# Altium PCB TL200蓝牙主板.PcbDoc
Units mm, origin at the board's own origin, x right, y up, seen from the top; angles counter-clockwise.
Board outline 65 x 53.06 mm, 2 copper layers (Top Layer, Bottom Layer); 107 components, 85 nets, 326 pads, 179 vias.
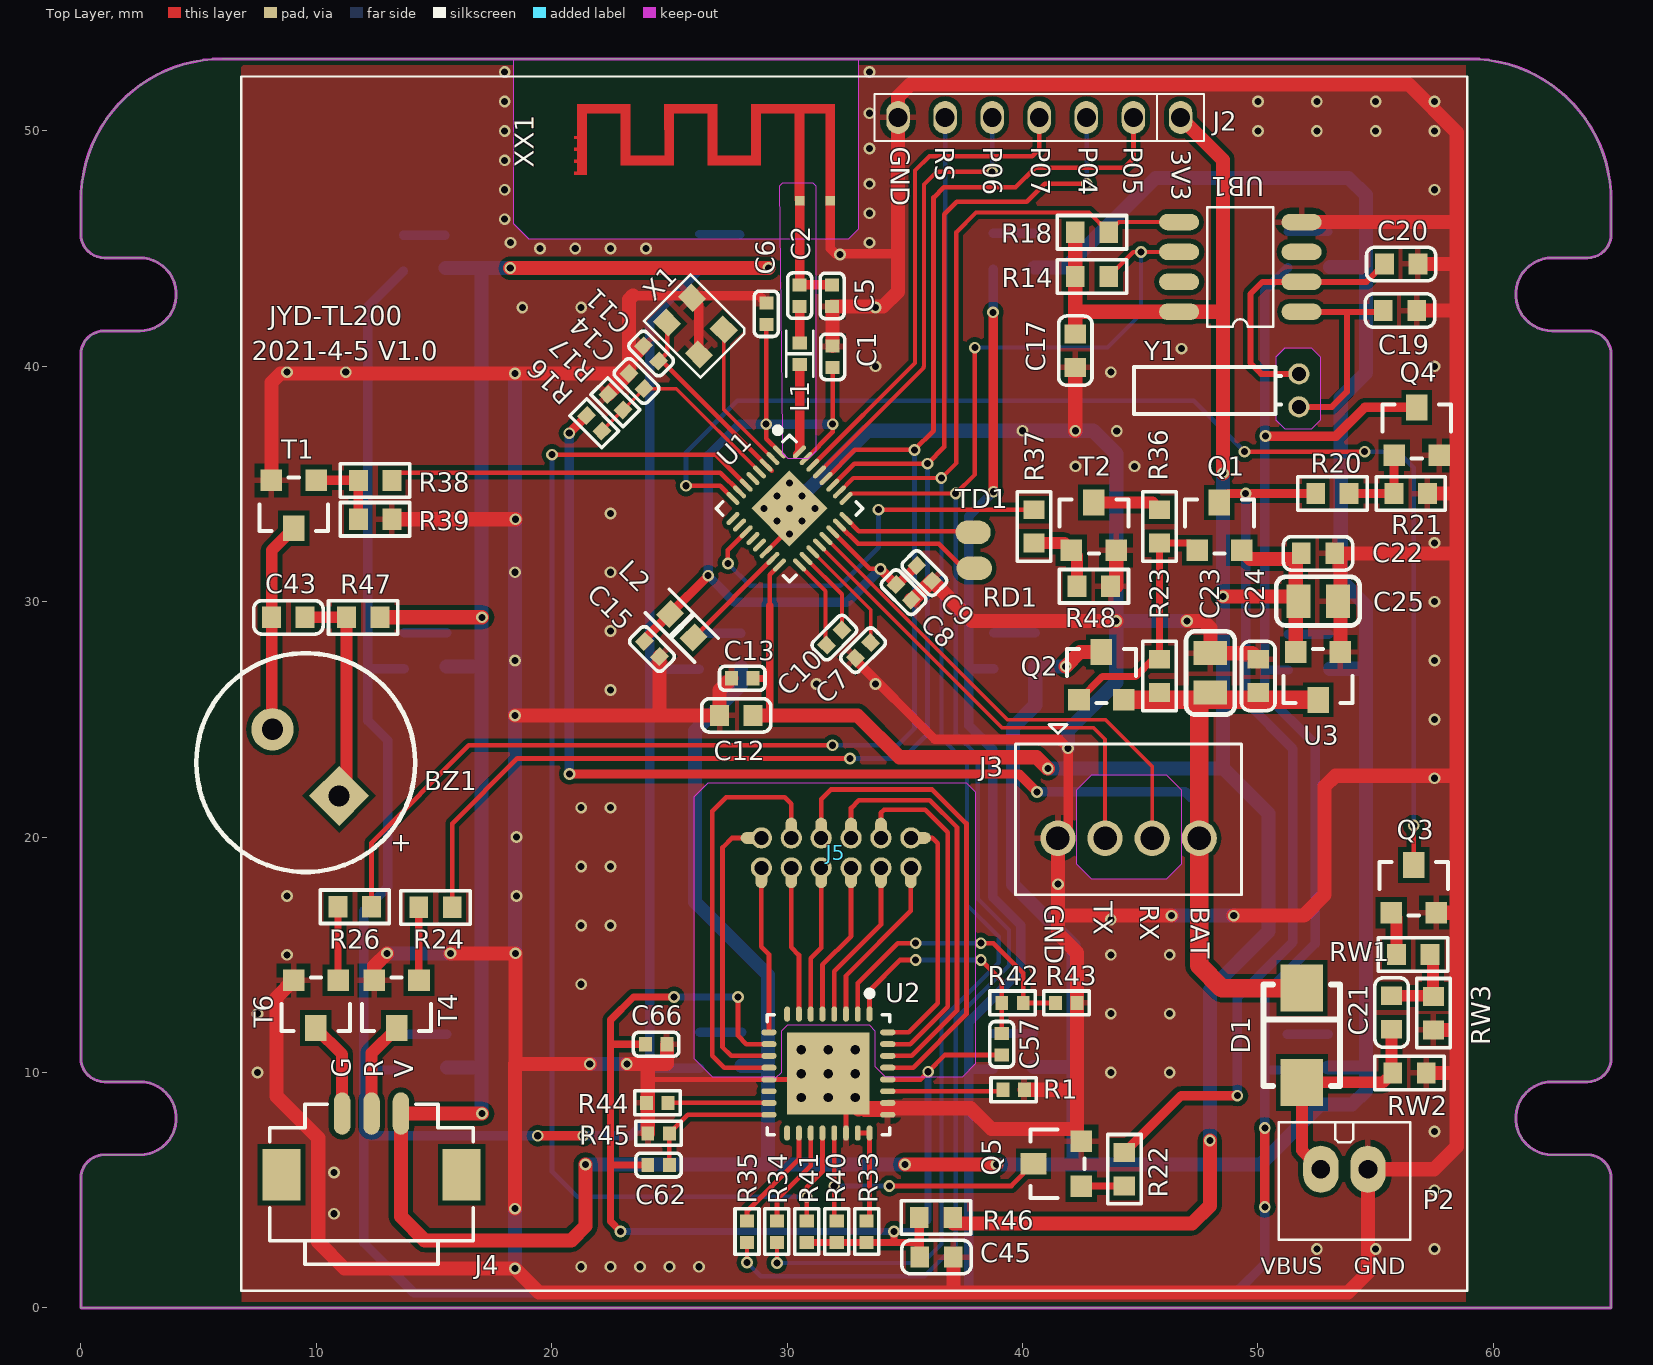
[diagram p0: Top Layer view]
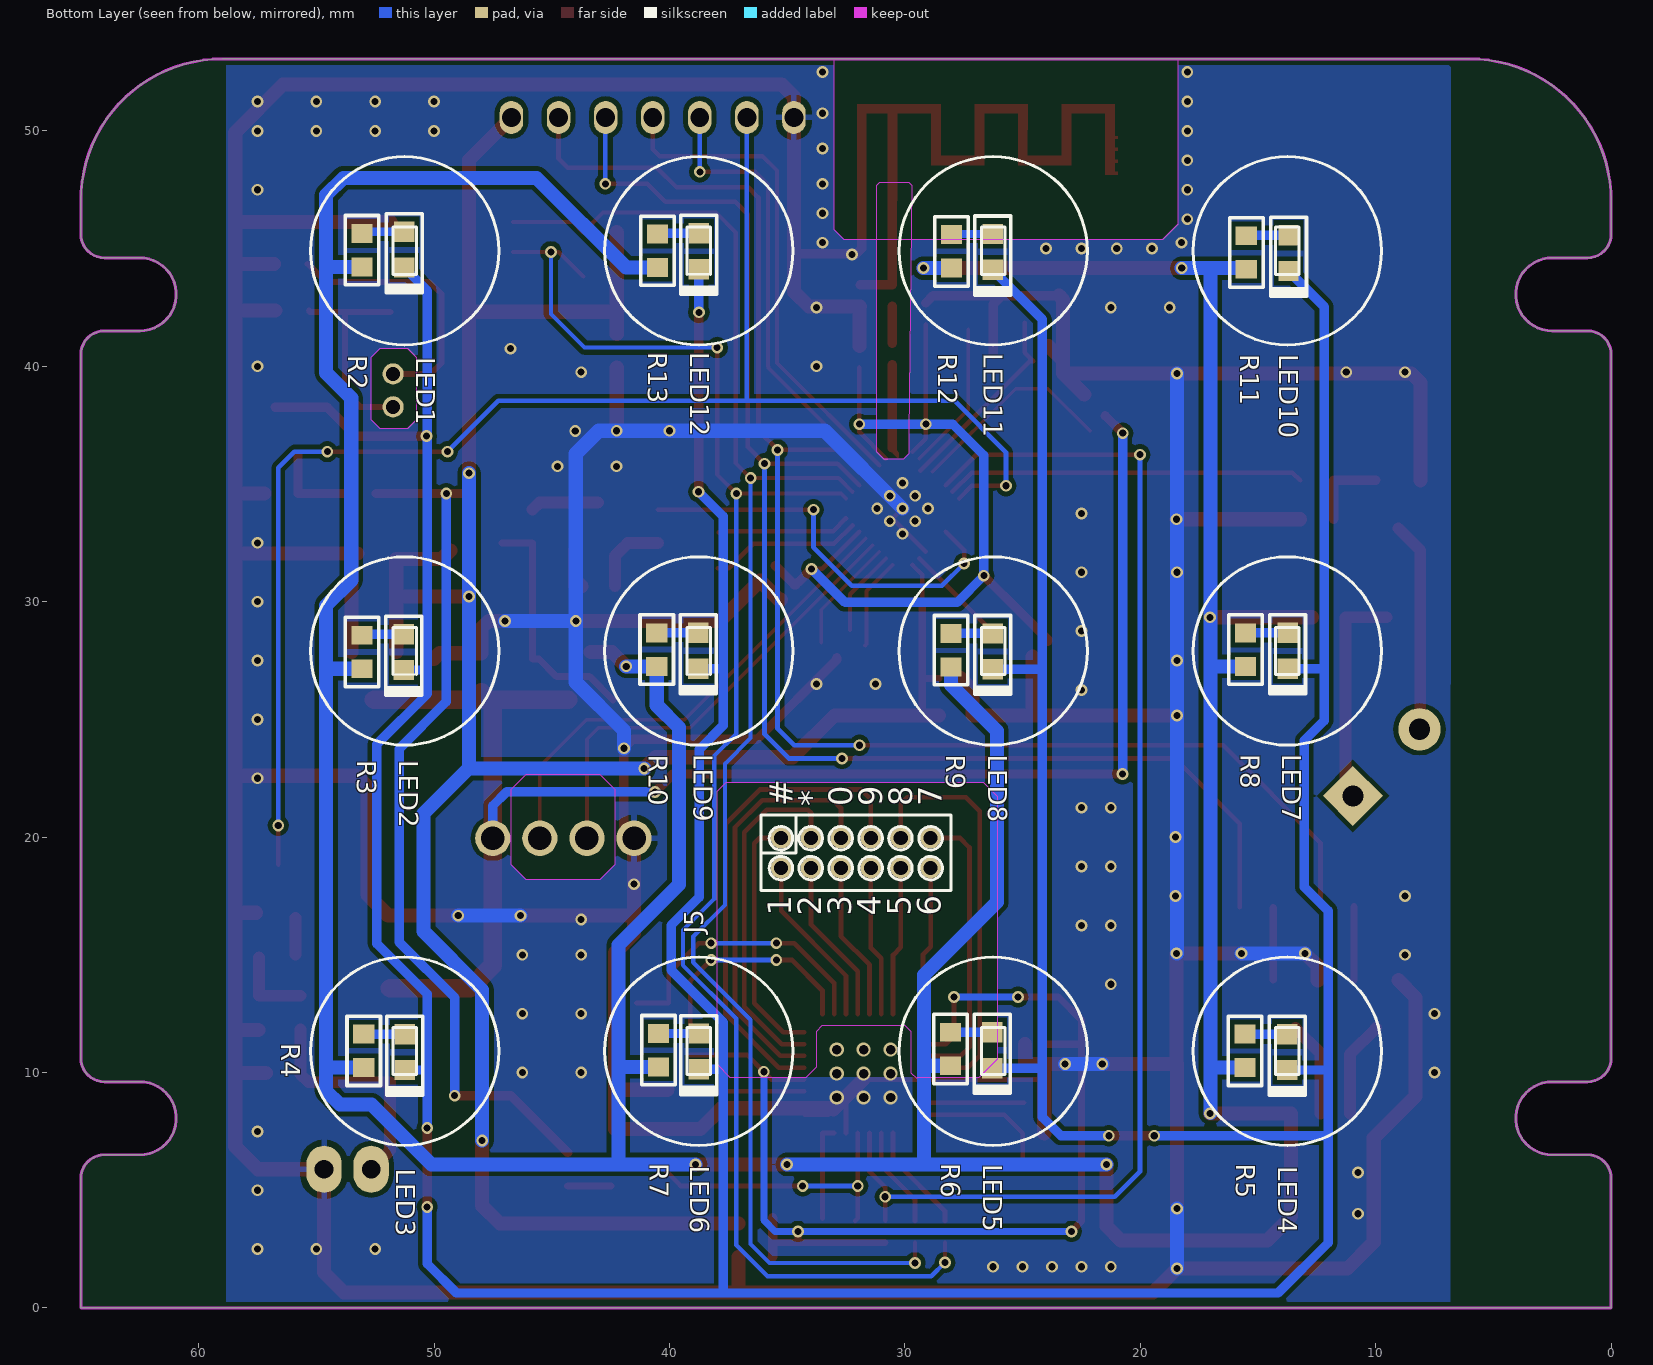
[diagram p1: Bottom Layer view, seen from below]
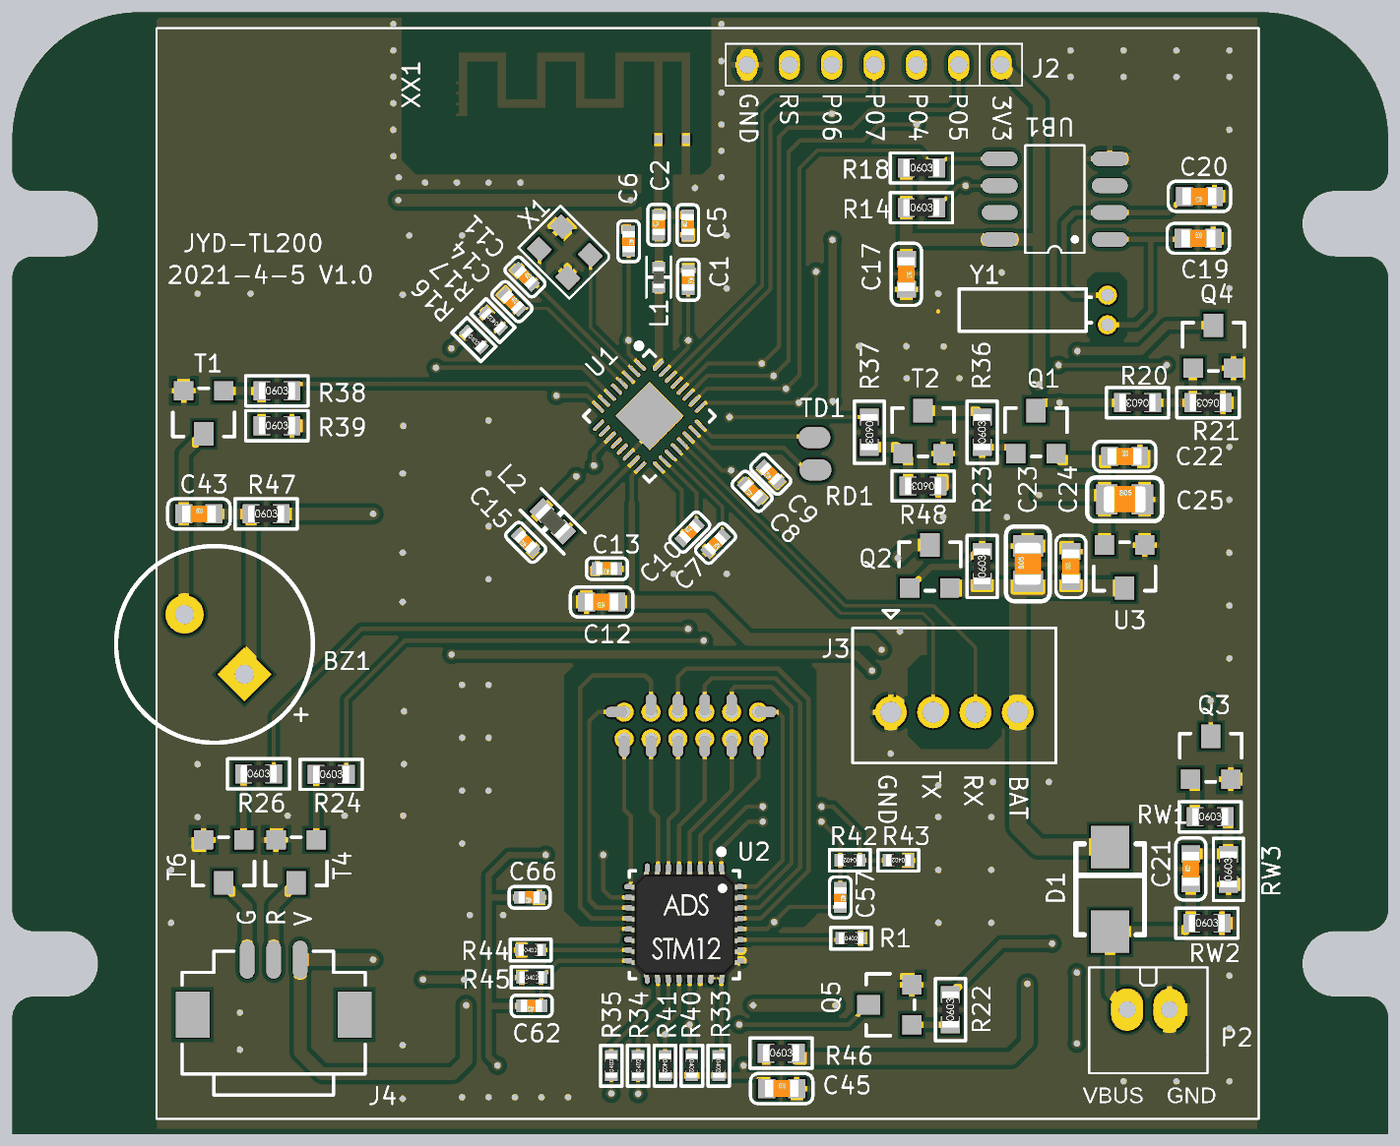
[diagram p2: 3D render of the assembled board from above, using the file's embedded part models]
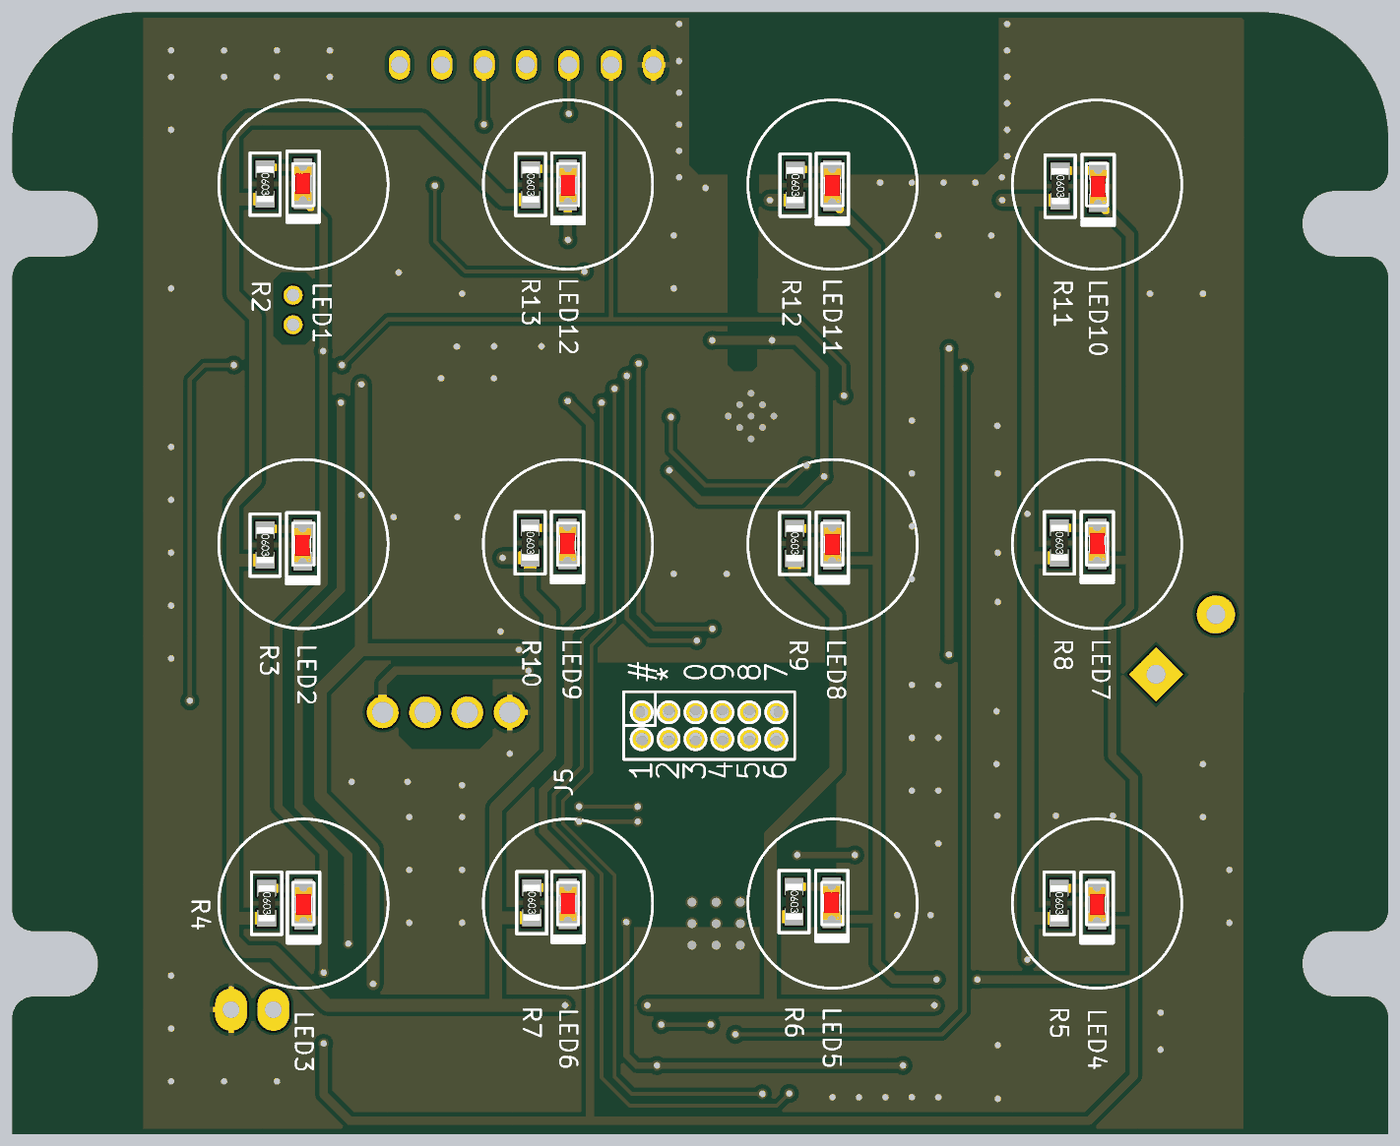
[diagram p3: 3D render of the assembled board from below, using the file's embedded part models]

## Layer stack, top to bottom
Top Layer: signal copper 0.0356
Dielectric: dielectric 0.32, FR-4, Dk 4.8
Bottom Layer: signal copper 0.0356

## Board outline
0,0 0,5.507 cw(c1,5.507) 1,6.507 2.5,6.507 ccw(c2.5,8.057) 2.5,9.607 1,9.607 cw(c1,10.607) 0,10.607 0,40.507 cw(c1,40.507) 1,41.507 2.5,41.507 ccw(c2.5,43.057) 2.5,44.607 1,44.607 cw(c1,45.607) 0,45.607 0,47.057 cw(c6,47.057) 6,53.057 59,53.057 cw(c59,47.057) 65,47.057 65,45.607 cw(c64,45.607) 64,44.607 62.5,44.607 ccw(c62.5,43.057) 62.5,41.507 64,41.507 cw(c64,40.507) 65,40.507 65,10.607 cw(c64,10.607) 64,9.607 62.5,9.607 ccw(c62.5,8.057) 62.5,6.507 64,6.507 cw(c64,5.507) 65,5.507 65,0

## Design rules (kind name [scope] priority, off if disabled: settings)
Clearance Clearance_1 [(IsWire)or(IsThruPin)or(IsFill)or(InPolygon)or(IsKeepOut) vs (IsWire)or(IsThruPin)or(IsFill)or(InPolygon)or(IsKeepOut)] p1 off: gap=0.279
Clearance [All] p2: gap=0.2
ComponentClearance [All] p1: gap=0 collisioncheckmode=3 verticalgap=0 showdistances=FALSE
HoleSize [All] p1: absolutevalues=TRUE maxlimit=10 minlimit=0.025 maxpercent=80.000 minpercent=20.000
HoleToHoleClearance [All] p1: gap=0 allowstackedmicrovias=TRUE
MinimumSolderMaskSliver [All] p1: minsoldermaskwidth=0
PolygonConnect PolygonConnect_1 [IsVia] p1: connectstyle=Direct reliefconductorwidth=0.254 reliefentries=4 polygonreliefangle="90 Angle" airgapwidth=0.254
PolygonConnect [All] p2: connectstyle=Relief reliefconductorwidth=0.254 reliefentries=4 polygonreliefangle="90 Angle" airgapwidth=0.254
RoutingVias [All] p1: holewidth=0.711 width=1.27 viastyle="Through Hole" minholewidth=0.152 minwidth=0.203 maxholewidth=0.711 maxwidth=0.711
ShortCircuit [All] p1: allowed=TRUE
SilkToSilkClearance [All] p1: silktosilkclearance=0
SilkToSolderMaskClearance SilkscreenOverComponentPads [IsPad] p1: minsilkscreentomaskgap=0 clearancetoexposedcopper=TRUE
SolderMaskExpansion [All] p1: expansion=0.102
Width [All] p1: maxlimit=2.032 minlimit=0.076 preferedwidth=0.254
21 further rules are at their usual default settings.

## Components (designator, comment, footprint, x,y, rotation, side; value= is the part's Value field where it differs from the comment)
BZ1 "BUZZER" BUZZER_D93_L40 9.55,23.165 r135 top
C1 "1uF/6.3V" LC-0402_C 31.934,40.402 r270 top
C2 "1.0pF" LC-0402_C 30.531,43.002 r90 top
C5 "NC" LC-0402_C 31.909,42.993 r90 top
C6 "0.1uF" LC-0402_C 29.115,42.231 r270 top
C7 "0.1uF" LC-0402_C 33.223,27.94 r225 top
C8 "1uF" LC-0402_C 34.949,30.404 r135 top
C9 "0.1uF" LC-0402_C 35.829,31.212 r135 top
C10 "0.1uF" LC-0402_C 32.004,28.475 r45 top
C11 "2.7pF" LC-0402_C 24.22,40.543 r315 top
C12 "10uF/6.3V" LC-0603_C 27.838,25.171 r180 top
C13 "0.1uF" LC-0402_C 28.092,26.746 r180 top
C14 "1nF" LC-0402_C 23.603,39.374 r315 top
C15 "10uF" LC-0402_C 24.257,27.991 r135 top
C17 "1uF/6.3V" LC-0603_C 42.24,40.665 r270 top
C19 "22pF" LC-0603_C 56.032,42.367 r0 top
C20 "22pF" LC-0603_C 56.083,44.348 r180 top
C21 "10uF/10V" LC-0603_C 55.677,12.548 r90 top
C22 "100nF" LC-0603_C 52.553,32.055 r0 top
C23 "22uF/10V" LC-0805_C 47.981,26.975 r90 top
C24 "100nF" LC-0603_C 50.013,26.848 r90 top
C25 "10uF/10V" LC-0805_C 52.553,30.023 r0 top
C43 "10uF/10V" LC-0603_C 8.814,29.337 r0 top
C45 "1uF" LC-0603_C 36.347,2.159 r0 top
C57 "820P 1%" LC-0402_C 39.116,11.201 r270 top
C62 "0.1uF" LC-0402_C 24.536,6.071 r180 top
C66 "0.1uF" LC-0402_C 24.435,11.201 r180 top
D1 "SS14" DO-214AA 51.867,11.582 r270 top
J2 "7P" 7P-2.0MM 46.711,50.571 r180 top
J3 "后板串口" 4P-2.0XX 41.504,19.952 r0 top
J4 "S3B-PH-KL" 3P-1.25mm-SMT 12.344,8.255 r0 top
J5 "Header 12H" 6P*2*1.27MM_1 32.08,19.329 r180 bottom
L1 "2nH" LC-0402_L 30.537,40.529 r270 top
L2 "4.7uH" LC-0603_L 25.527,28.981 r315 top
LED1 "LED" 0603LED 51.269,44.956 r270 bottom
LED2 "LED" 0603LED 51.283,27.861 r270 bottom
LED3 "LED" 0603LED 51.246,10.869 r270 bottom
LED4 "LED" 0603LED 13.753,10.87 r270 bottom
LED5 "LED" 0603LED 26.289,10.947 r270 bottom
LED6 "LED" 0603LED 38.749,10.896 r270 bottom
LED7 "LED" 0603LED 13.741,27.915 r270 bottom
LED8 "LED" 0603LED 26.264,27.89 r270 bottom
LED9 "LED" 0603LED 38.774,27.915 r270 bottom
LED10 "LED" 0603LED 13.702,44.808 r270 bottom
LED11 "LED" 0603LED 26.264,44.859 r270 bottom
LED12 "LED" 0603LED 38.749,44.884 r270 bottom
P2 "应急接口" 2PIN-2.0 53.67,5.893 r180 top
Q1 "SI2301" "SOT-23 - GDS" 48.362,33.198 r0 top
Q2 "SI2301" "SOT-23 - GDS" 43.348,26.848 r0 top
Q3 "PMBT3904" SOT-23-3L 56.617,17.805 r0 top
Q4 "SS8050" SOT-23-3L 56.744,37.236 r0 top
Q5 "PMBT3904" SOT-23-3L 41.478,6.121 r90 top
R1 "2M1%" LC-0402_R 39.624,9.271 r0 top
R2 "100R" LC-0603_R 53.061,44.933 r270 bottom
R3 "100R" LC-0603_R 53.061,27.861 r270 bottom
R4 "100R" LC-0603_R 52.984,10.922 r270 bottom
R5 "100R" LC-0603_R 15.545,10.922 r270 bottom
R6 "100R" LC-0603_R 28.067,10.998 r270 bottom
R7 "100R" LC-0603_R 40.462,10.947 r270 bottom
R8 "100R" LC-0603_R 15.533,27.965 r270 bottom
R9 "100R" LC-0603_R 28.042,27.94 r270 bottom
R10 "100R" LC-0603_R 40.538,27.965 r270 bottom
R11 "100R" LC-0603_R 15.494,44.831 r270 bottom
R12 "100R" LC-0603_R 28.016,44.882 r270 bottom
R13 "100R" LC-0603_R 40.513,44.907 r270 bottom
R14 "10K" LC-0603_R 42.951,43.815 r0 top
R16 "510K%1" LC-0402_R 21.807,37.578 r315 top
R17 "100K%1" LC-0402_R 22.705,38.476 r135 top
R18 "10K" LC-0603_R 42.951,45.695 r0 top
R20 "1K" LC-0603_R 53.162,34.595 r180 top
R21 "10K" LC-0603_R 56.49,34.595 r180 top
R22 "10K" LC-0603_R 44.323,5.893 r90 top
R23 "100K" LC-0603_R 45.822,26.848 r90 top
R24 "10K" LC-0603_R 15.062,17.018 r0 top
R26 "10K" LC-0603_R 11.633,17.043 r0 top
R33 "10K" LC-0402_R 33.375,3.241 r270 top
R34 "10R" LC-0402_R 29.565,3.241 r90 top
R35 "10R" LC-0402_R 28.295,3.241 r90 top
R36 "1K" LC-0603_R 45.822,33.198 r90 top
R37 "4.7K" LC-0603_R 40.488,33.198 r270 top
R38 "1K" LC-0603_R 12.497,35.154 r0 top
R39 "10K" LC-0603_R 12.497,33.503 r0 top
R40 "10K" LC-0402_R 32.105,3.241 r270 top
R41 "10K" LC-0402_R 30.835,3.241 r270 top
R42 "510K1%" LC-0402_R 39.573,12.954 r180 top
R43 "2M1%" LC-0402_R 41.859,12.954 r180 top
R44 "36K 1%" LC-0402_R 24.486,8.712 r0 top
R45 "330K" LC-0402_R 24.536,7.417 r0 top
R46 "0R-空" LC-0603_R 36.322,3.835 r0 top
R47 "10R" LC-0603_R 11.989,29.337 r0 top
R48 "100K" LC-0603_R 43.028,30.658 r180 top
RD1 "DC+" "TP-THD - 1mm" 37.948,31.42 r0 top
RW1 "22R" LC-0603_R 56.591,15.011 r0 top
RW2 "100K" LC-0603_R 56.439,9.982 r0 top
RW3 "100K" LC-0603_R 57.455,12.522 r90 top
T1 "SS8050" SOT-23-3L 9.042,34.138 r180 top
T2 "PMBT3904" SOT-23-3L 43.028,33.198 r0 top
T4 "PMBT3904" SOT-23-3L 13.411,12.903 r180 top
T6 "PMBT3904" SOT-23-3L 9.982,12.903 r180 top
TD1 "DC+" "TP-THD - 1mm" 37.897,32.944 r0 top
U1 "BK3431Q" QFN32_4*4*0.4 30.099,33.96 r315 top
U2 "TSM12M" ADS_TMS12 31.75,9.957 r270 top
U3 "HT7533" SOT-23-3L 52.553,26.848 r180 top
UB1 "PCF8563" SOP8 49.251,44.221 r180 top
X1 "16MHZ" XTAL3225 26.106,41.71 r135 top
XX1 "TIANX" BT_NAMI_1 30.531,47.041 r0 top
Y1 "32.768KHZ" 晶振-9 51.74,38.278 r90 top

## Footprints (in the part's own frame and the unit in brackets; to place one, negate y for a bottom-side part, rotate by r counter-clockwise, add the part's x,y. Pads: shape width x height; smd on the part's side, far side on the other; paste and mask are expansions set on the pad)
2PIN-2.0 [mm]
  oval 1.5x2 hole 0.8: 1(-1,0) 2(1,0)
  silkscreen extent -2.8,-2 2.79,3
3P-1.25mm-SMT [mm]
  oval 0.7x1.8 smd mask+0.05: 1(-1.25,0) 2(0,0) 3(1.25,0)
  rect 1.6x2.2 smd mask+0.05: 4(-3.825,-2.6) 5(3.825,-2.6)
  silkscreen extent -4.33,-6.4 4.33,0.4
4P-2.0XX [mm]
  round 1.5 hole 1: 1(0,0) 2(2,0) 3(4,0) 4(6,0)
  silkscreen extent -1.8,-2.4 7.8,4.83
6P*2*1.27MM_1 [mm]
  oval 1x0.5 smd far side: 1(-3.527,0.635) 11(3.556,0.635)
  round 0.9 hole 0.6 paste+1: 1(-3.175,0.635)
  oval 0.5x1 smd far side: 2(-3.175,-1) 3(-1.905,1) 4(-1.905,-1) 5(-0.635,1) 6(-0.635,-1) 7(0.635,1) 8(0.635,-1) 9(1.905,1) 10(1.905,-1) 12(3.175,-1)
  round 0.9 hole 0.6 paste+0: 2(-3.175,-0.635) 3(-1.905,0.635) 4(-1.905,-0.635) 5(-0.635,0.635) 6(-0.635,-0.635) 7(0.635,0.635) 8(0.635,-0.635) 9(1.905,0.635) 10(1.905,-0.635) 11(3.175,0.635) 12(3.175,-0.635)
  silkscreen extent -4.04,-1.6 4.04,1.6
7P-2.0MM [mm]
  oval 1x1.4 hole 0.8 mask+0.05: 1(0,0) 2(2,0) 3(4,0) 4(6,0) 5(8,0) 6(10,0) 7(12,0)
  silkscreen extent -1,-1 13,1
0603LED [mil]
  rect 34x34 smd: 1(-30,0) 2(30,0)
  silkscreen extent -60,-30 72,30, body extent -31,-16 31,16, height 24
ADS_TMS12 [mm]
  oval 0.65x0.25 smd: 1(-2.525,1.75) 2(-2.525,1.25) 3(-2.525,0.75) 4(-2.525,0.25) 5(-2.525,-0.25) 6(-2.525,-0.75) 7(-2.525,-1.25) 8(-2.525,-1.75) 17(2.525,-1.75) 18(2.525,-1.25) 19(2.525,-0.75) 20(2.525,-0.25) 21(2.525,0.25) 22(2.525,0.75) 23(2.525,1.25) 24(2.525,1.75)
  oval 0.25x0.65 smd: 9(-1.75,-2.525) 10(-1.25,-2.525) 11(-0.75,-2.525) 12(-0.25,-2.525) 13(0.25,-2.525) 14(0.75,-2.525) 15(1.25,-2.525) 16(1.75,-2.525) 25(1.75,2.525) 26(1.25,2.525) 27(0.75,2.525) 28(0.25,2.525) 29(-0.25,2.525) 30(-0.75,2.525) 31(-1.25,2.525) 32(-1.75,2.525)
  rect 3.5x3.5 smd: 33(0,0)
  silkscreen extent -3.52,-2.6 2.6,2.6, body extent -2.46,-2.49 2.54,2.51, height 0.9
BT_NAMI_1 [mm]
  rect 0.4x0.4 smd: 1(0,0) 2(1.3,0)
  Top Layer region: -7.2,4.1 -9.45,4.1 -9.45,2.74 -9.58,2.74 -9.58,2.63 -9.45,2.63 -9.45,2.24 -9.58,2.24 -9.58,2.12 -9.45,2.12 -9.45,1.73 -9.58,1.73 -9.58,1.61 -9.45,1.61 -9.45,1.22 -9.58,1.22 -9.58,1.1 -9.05,1.1 -9.05,3.7 -7.6,3.7 -7.6,1.5 -5.35,1.5 -5.35,3.7 -3.9,3.7 -3.9,1.5 -1.65,1.5 -1.65,3.7 -0.2,3.7 -0.2,0 0.2,0 0.2,3.7 1.1,3.7 1.1,0 1.5,0 1.5,4.1 -2.05,4.1 -2.05,1.91 -3.5,1.91 -3.5,4.1 -5.75,4.1 -5.74,1.9 -7.2,1.9
BUZZER_D93_L40 [mm]
  rect 1.8x1.8 hole 0.9: 1(-2,0)
  round 1.8 hole 0.9: 2(2,0)
  silkscreen extent -4.65,-4.65 4.65,4.65
DO-214AA [mm]
  rect 2x1.8 smd: 1(2,0) 2(-2,0)
  silkscreen extent -2.15,-1.63 2.15,1.63
LC-0402_C [mm]
  rect 0.55x0.6 smd mask+0.051: 1(-0.457,0) 2(0.457,0)
  silkscreen extent -0.97,-0.51 0.97,0.51, body extent -0.48,-0.3 0.52,0.3, height 0.2
LC-0402_L [mm]
  rect 0.55x0.6 smd mask+0.051: 1(-0.457,0) 2(0.457,0)
  silkscreen extent -0.98,-0.58 0.97,0.58, body extent -0.51,-0.26 0.54,0.26, height 0.36
LC-0402_R [mm]
  rect 0.55x0.6 smd mask+0.051: 1(-0.457,0) 2(0.457,0)
  silkscreen extent -0.97,-0.51 0.97,0.51, body extent -0.57,-0.27 0.58,0.28, height 0.41
LC-0603_C [mm]
  rect 0.8x0.9 smd: 1(-0.711,0) 2(0.711,0)
  silkscreen extent -1.47,-0.71 1.47,0.71, body extent -0.8,-0.4 0.8,0.4, height 0.3
LC-0603_L [mm]
  rect 0.8x0.9 smd: 1(-0.711,0) 2(0.711,0)
  silkscreen extent -1.47,-0.71 1.47,0.71, body extent -0.82,-0.41 0.83,0.41, height 0.46
LC-0603_R [mm]
  rect 0.8x0.9 smd: 1(-0.711,0) 2(0.711,0)
  silkscreen extent -1.47,-0.71 1.47,0.71, body extent -0.85,-0.4 0.85,0.4, height 0.56
LC-0805_C [mil]
  rect 40x56 smd: 1(-33,0) 2(33,0)
  silkscreen extent -70,-41 70,41, body extent -39,-25 39,25, height 30
QFN32_4*4*0.4 [mm]
  rect 2.3x2.3 smd paste-0.025 mask+0.051: 0(0,0)
  oval 0.7x0.2 smd paste-0.025 mask+0.051: 1(-2,1.4) 2(-2,1) 3(-2,0.6) 4(-2,0.2) 5(-2,-0.2) 6(-2,-0.6) 7(-2,-1) 8(-2,-1.4) 17(2,-1.4) 18(2,-1) 19(2,-0.6) 20(2,-0.2) 21(2,0.2) 22(2,0.6) 23(2,1) 24(2,1.4)
  oval 0.2x0.7 smd paste-0.025 mask+0.051: 9(-1.4,-2) 10(-1,-2) 11(-0.6,-2) 12(-0.2,-2) 13(0.2,-2) 14(0.6,-2) 15(1,-2) 16(1.4,-2) 25(1.4,2) 26(1,2) 27(0.6,2) 28(0.2,2) 29(-0.2,2) 30(-0.6,2) 31(-1,2) 32(-1.4,2)
  silkscreen extent -2.82,-2.2 2.2,2.2
SOP8 [mm]
  oval 1.7x0.7 smd mask+0.05: 1(-2.6,1.905) 2(-2.6,0.635) 3(-2.6,-0.635) 4(-2.6,-1.905) 5(2.6,-1.905) 6(2.6,-0.635) 7(2.6,0.635) 8(2.6,1.905)
  round 0.4 on Top Overlay mask+0.05: ""(-0.949,1.905)
  silkscreen extent -1.4,-2.54 1.4,2.54
"SOT-23 - GDS" [mil]
  rect 36x43.31 smd: D(0,40)
  rect 36x36 smd: G(-37.4,-40) S(37.4,-40)
  silkscreen extent -57,-45 58,45
SOT-23-3L [mil]
  rect 36x36 smd: 1(-37.4,-40) 2(37.4,-40)
  rect 36x43.31 smd: 3(0,40)
  silkscreen extent -57,-45 58,45
"TP-THD - 1mm" [mm]
  oval 1.5x1 smd: 1(0,0)
XTAL3225 [mm]
  rect 0.9x0.8 smd: 1(-0.95,-0.75) 2(0.95,-0.75) 3(0.95,0.75) 4(-0.95,0.75)
  silkscreen extent -1.7,-1.4 1.7,1.4
晶振-9 [mm]
  round 0.9 hole 0.6: 1(0,0) 2(1.4,0)
  rect 0x0 smd: 3(0.635,8)
  silkscreen extent -0.3,0.76 1.7,7

## Part data
BZ1: "Buzzer"
C1 C2 C5 C6 C7 C8 C9 C10 C11 C12 C13 C15: library part Cap, "Capacitor"
C14 C21 C22 C24: library part CAP-NP, "Capacitor, Ceramic"
C17 C19 C20: library part C
C23 C25: library part CAP-P, "Capacitor, tolerance ±20%"
C43: library part C_0_Dup1
C45: library part C-C?, "Electrolytic Capacitor"
C57 C62 C66: library part CAP, "Capacitor"
D1: library part D
J3: library part "Header 4H", "Header, 4-Pin, Right Angle"
J4: library part "Header 3", "Header, 3-Pin"
J5: "Header, 12-Pin, Right Angle"
L1 L2: "Power Inductor, 4.7uH, 0.7A, 260mR DCR"
P2: library part "Header 2", "Header, 2-Pin"
Q1 Q2: library part PWRMOSFET_EP_DGS_0
Q4 Q5 T1 T2 T4 T6: library part NPN_BJT, "Bipolar Junction Transistor"
R1 R22 R33 R40 R41 R42 R43 R44 R45: library part RES2
R2 R3 R4 R5 R6 R7 R8 R9 R10 R11 R12 R13 R20 R21 R23 R36 R37 R47 R48 RW1 RW2 RW3: library part R
R14 R18: library part RES_0603A, "Resistor"
R16 R17: library part Res2, "Resistor"
R24 R26: library part RES
R34 R35 R38 R39: library part R_Dup1
R46: library part POWER-R
RD1 TD1: library part con1
U3: library part XC6206P302M
UB1: library part IC8
Y1: library part 晶振

## Via types
v1: diameter 0.5, hole 0.3, Top Layer to Bottom Layer, tented both sides, 170 vias
v2: diameter 0.6, hole 0.4, Top Layer to Bottom Layer, tented both sides, 9 vias

## Nets (pads, with @x,y where several pads share a name; then routed paths per layer and width w, separated by ;. In a path a pad name is that pad's centre, name@x,y a point inside that pad or via, vN(x,y) a via of type N, cw(c..) or ccw(c..) an arc to the next point about the centre after c; other vN are vias at no path point)
BAT_ADC: C14.2 R16.2 R17.1 U1.4 | length 8.9
  Top Layer w0.152: R16.2 C14.2 25.291,39.05 U1.4
BEEP: R38.2 U1.7 | length 15.2
  Top Layer w0.2: R38.2 13.538,35.484 27.161,35.484 U1.7
GND: C1.1 C5.1 C6.1 C7.2 C8.1 C9.1 C11.1 C12.2 C13.2 C14.1 C15.1 C17.2 C19.2 C20.1 C22.2 C23.2 C24.2 C25.2 C45.2 C66.1 J2.7 J3.1 P2.1 Q3.2 Q4.2 Q5.2 R1.2 R17.2 R21.1 R39.2 R43.1 R44.1 R45.1 R48.1 RW2.2 RW3.1 T1.2 T2.2 T4.2 T6.2 U1.0 U1.14 U2.13 U2.22 U2.25 U2.26 U2.33 U3.1 UB1.4 X1.2 X1.4 XX1.2 | length 411.4
  Top Layer w0.2: 24.054,9.707 U2.13 31.5,9.707 v2(31.75,9.957) ; U1.14 30.409,33.421 v1(30.638,33.421) v1(30.099,33.96) ; U2.22 U2.33@32.5,8.941 ; U2.33@33.033,8.433 33.259,8.207 U2.25
  Top Layer w0.4: 23.444,43.002 28.801,43.002 C6.1 ; X1.2 26.248,42.63 X1.4 ; XX1.2 31.831,45.004 32.055,44.78 34.711,44.78 ; C7.2 32.9,27.527 36.271,24.155 41.554,24.155 v1(41.935,23.774) 41.935,20.383 J3.1
  Top Layer w0.6: T1.2 8.092,39.309 8.48,39.697 v1(18.44,39.697) C14.1 ; T6.2 8.306,13.193 8.306,8.992 10.084,7.214 10.084,2.794 11.201,1.676 v1(18.44,1.676) 19.456,0.66 37.059,0.66 ; T4.2 12.461,14.519 v1(13.005,15.062) ; R39.2 v1(18.466,33.503) ; v1(15.697,15.062) v1(18.466,15.062) 18.466,10.389 18.44,10.363 ; v1(18.44,4.216) 18.44,10.363 ; v1(18.44,25.171) 24.638,25.171 ; v1(21.615,10.363) 18.44,10.363 ; R17.2 C14.1 ; v1(23.19,10.363) 24.867,10.363 24.892,10.389 C66.1 ; 23.368,40.337 C11.1 ; 23.444,43.002 23.28,42.838 C14.1 ; R45.1 24.079,10.312 ; C15.1 24.58,25.229 24.638,25.171 ; C13.2 27.127,26.238 C12.2 24.638,25.171 ; U2.33@31.75,9.716 32.983,8.484 U2.33@33.033,8.484 ; C1.1 31.934,42.51 C5.1 34.077,42.536 34.711,43.169 J2.7 34.711,51.449 35.23,51.968 56.413,51.968 58.445,49.936 58.445,42.393 ; U2.33@33.033,8.433 U2.33@33.033,8.484 ; C8.1 35.344,30.081 C9.1 37.856,29.185 v1(43.978,29.185) ; C45.2 37.059,0.66 ; R1.2 42.316,9.271 ; J3.1 41.504,16.662 ; v1(42.24,37.262) C17.2 ; R48.1 R48.1@43.978,30.897 ; R48.1@43.978,30.658 R48.1@43.978,30.897 ; T2.2 R48.1@43.978,30.897 ; v1(46.33,16.662) 41.504,16.662 ; v1(46.99,29.185) 47.676,29.185 47.981,28.88 C23.2 49.759,27.813 C24.2 ; v1(48.971,16.662) 51.943,16.662 52.832,17.551 52.832,22.149 53.289,22.606 58.445,22.606 ; UB1.4 58.445,46.126 ; C22.2 58.42,32.055 58.445,32.029 ; U3.1 C22.2@53.503,32.014 ; C19.2 58.42,42.367 58.445,42.393 ; C20.1 58.42,44.348 ; RW2.2 58.42,9.982 58.445,9.957 ; R21.1 58.445,34.595 ; RW3.1 58.42,11.811 58.445,11.786 ; Q3.2 58.42,16.789 ; U2.33@33.033,8.484 37.795,8.484 38.684,7.595 42.316,7.595 42.316,9.271 ; 37.059,0.66 53.823,0.66 54.67,1.508 P2.1 57.48,5.893 58.445,6.858 58.445,9.957 ; 41.504,16.662 41.504,15.9 42.316,15.088 R43.1 42.316,9.271 ; 58.445,9.957 58.445,11.786 ; 58.445,11.786 58.445,22.606 ; 58.445,22.606 58.445,32.029 ; 58.445,32.029 58.445,34.595 ; 58.445,34.595 58.445,42.393
  Bottom Layer w0.6: v1(13.005,15.062) v1(15.697,15.062) ; v1(18.44,1.676) v1(18.44,4.216) ; v1@18.44,15.062 v1(18.44,25.171) v1(18.44,39.697) ; v1(21.615,10.363) v1(23.19,10.363) ; v1(30.099,33.96) 33.401,37.262 v1(42.24,37.262) 43.002,37.262 43.978,36.286 v1(43.978,29.185) ; v1(41.935,23.774) 41.935,24.536 43.978,26.579 v1(43.978,29.185) ; v1(46.33,16.662) v1(48.971,16.662) ; v1(46.99,29.185) v1(43.978,29.185)
  other v1: 21.25,1.75 22.5,1.75 23.75,1.75 25,1.75 26.25,1.75 52.5,2.5 55,2.5 57.5,2.5 10.75,4 57.5,5 10.75,5.75 57.5,7.5 7.5,10 43.75,10 46.25,10 7.5,12.5 43.75,12.5 46.25,12.5 21.25,13.75 8.75,15 43.75,15 46.25,15 21.25,16.25 22.5,16.25 43.75,16.5 8.75,17.5 18.5,17.5 41.5,18 21.25,18.75 22.5,18.75 18.5,20 21.25,21.25 22.5,21.25 57.5,22.5 57.5,25 22.5,26.25 31.25,26.5 33.75,26.5 18.44,27.5 57.5,27.5 22.5,28.75 57.5,30 18.44,31.25 22.5,31.25 57.5,32.5 30.099,32.882 29.56,33.421 22.5,33.75 29.021,33.96 31.177,33.96 29.56,34.499 30.638,34.499 30.099,35.037 42.25,35.75 44.75,35.75 44,37.25 40,37.262 8.75,39.75 11.25,39.75 43.75,39.75 33.75,40 57.5,40 46.75,40.75 18.75,42.5 21.25,42.5 33.75,42.5 32.25,44.75 19.5,45 21,45 22.5,45 24,45 18.25,45.25 33.5,45.25 18,46.25 33.5,46.5 18,47.5 57.5,47.5 33.5,47.75 18,48.75 33.5,49.25 18,50 50,50 52.5,50 55,50 57.5,50 33.5,50.75 18,51.25 50,51.25 52.5,51.25 55,51.25 57.5,51.25 18,52.5 33.5,52.5
  other v2: 30.607,8.941 31.75,8.941 32.893,8.941 30.607,9.957 32.893,9.957 30.607,10.973 31.75,10.973 32.893,10.973
GREEN_LL: J4.1 T6.3 | length 4.1
  Top Layer w0.508: T6.3 11.094,10.775 J4.1
INT_APT: U1.12
INT_FP: U1.5
IRQ_TSM12: R41.1 U1.6 U2.20 | length 54.5
  Top Layer w0.2: v1(20.015,36.246) 26.964,36.246 U1.6 ; R41.1 30.835,4.723 v1(30.836,4.724) 30.836,5.131 31.5,5.795 U2.20
  Bottom Layer w0.2: v1(20.015,36.246) 20.015,5.791 21.082,4.724 v1(30.836,4.724)
KEY0: J5.5 U2.30 | length 17.9
  Top Layer w0.2: J5.5@32.715,19.964 32.715,20.329 32.715,21.234 33.043,21.562 36.063,21.562 37.217,20.408 37.217,12.637 35.287,10.707 U2.30
KEY1: J5.2 U2.3 | length 7.4
  Top Layer w0.2: U2.3 32.5,14.11 35.255,16.866 35.255,18.329 J5.2@35.255,18.694
KEY2: J5.4 U2.4 | length 7
  Top Layer w0.2: U2.4 32,14.296 33.985,16.281 33.985,18.329 J5.4@33.985,18.694
KEY3: J5.6 U2.5 | length 6.7
  Top Layer w0.2: U2.5 31.5,14.584 32.715,15.799 32.715,18.329 J5.6@32.715,18.694
KEY4: J5.8 U2.6 | length 6.4
  Top Layer w0.2: U2.6 31,14.846 31.445,15.291 31.445,18.329 J5.8@31.445,18.694
KEY5: J5.10 U2.7 | length 6.3
  Top Layer w0.2: J5.10@30.175,18.694 30.175,18.329 30.175,15.316 30.5,14.991 U2.7
KEY6: J5.12 U2.9 | length 7.1
  Top Layer w0.2: J5.12@28.905,18.694 28.905,18.329 28.905,15.342 29.225,15.022 U2.9
KEY7: J5.11 U2.11 | length 12.4
  Top Layer w0.2: J5.11@28.905,19.964 28.524,19.964 27.661,19.964 27.254,19.558 27.254,11.074 27.622,10.707 U2.11
KEY8: J5.9 U2.12 | length 18.2
  Top Layer w0.2: U2.12 27.334,10.207 26.822,10.719 26.822,21.107 27.407,21.692 29.896,21.692 30.175,21.412 30.175,20.329 J5.9@30.175,19.964
KEY9: J5.7 U2.29 | length 21
  Top Layer w0.2: J5.7@31.445,19.964 31.445,20.329 31.445,21.615 31.852,22.022 36.17,22.022 37.617,20.574 37.617,12.471 35.353,10.207 U2.29
KEY#: J5.1 U2.32 | length 10.7
  Top Layer w0.2: U2.32 35.156,11.707 36.398,12.949 36.398,19.736 36.17,19.964 35.607,19.964 J5.1@35.255,19.964
KEY*: J5.3 U2.31 | length 15
  Top Layer w0.2: J5.3@33.985,19.964 33.985,20.329 33.985,21.031 34.116,21.162 35.861,21.162 36.817,20.206 36.817,12.803 35.221,11.207 U2.31
M3V3: C12.1 C13.1 C17.1 C22.1 C25.1 J2.1 Q1.S R14.1 R18.1 R46.2 U1.16 U3.2 UB1.8 | length 108.3
  Top Layer w0.2: 29.261,29.845 29.261,31.142 U1.16
  Top Layer w0.3: C13.1 29.235,26.746 ; 29.261,29.845 29.261,25.248 29.337,25.171
  Top Layer w0.6: C12.1 29.337,25.171 32.995,25.171 34.773,23.393 40.589,23.393 v1(41.072,22.911) ; R46.2@37.059,3.581 47.193,3.581 47.955,4.343 v1(47.955,7.112) ; C17.1 R18.1 ; 42.266,42.316 UB1.8 48.514,42.316 ; J2.1 48.514,48.768 48.514,42.316 ; v1(48.514,30.226) 51.399,30.226 C25.1@51.603,30.023 ; v1(48.514,35.458) 48.514,42.316 ; Q1.S 49.677,31.816 51.603,31.816 C25.1@51.603,30.023 ; U3.2 C25.1@51.603,30.023
  Bottom Layer w0.6: v1(41.072,22.911) 48.539,22.911 50.444,21.006 50.444,16.002 47.955,13.513 v1(47.955,7.112) ; 48.514,22.911 v1(48.514,30.226) v1(48.514,35.458)
NetBZ1_1: BZ1.1 C43.2 R47.1 | length 9.5
  Top Layer w0.5: C43.2 R47.1 11.278,22.064 BZ1.1
NetBZ1_2: BZ1.2 C43.1 T1.3 | length 8.9
  Top Layer w0.5: BZ1.2@8.103,24.613 C43.1 8.103,32.182 T1.3
NetC2_1: C2.1 L1.1 | length 1.6
  Top Layer w0.4: C2.1 30.537,42.538 L1.1
NetC2_2: C2.2 C5.2 XX1.1 | length 5
  Top Layer w0.4: XX1.1 C2.2 C5.2@31.9,43.459
NetC7_1: C7.1 U1.19 | length 4.9
  Top Layer w0.152: U1.19 33.546,29.664 C7.1
NetC10_1: C10.1 U1.17 | length 3.9
  Top Layer w0.178: U1.17 31.632,30.447 31.632,28.201 C10.1
NetC10_2: C10.2 U1.18 | length 3.7
  Top Layer w0.178: U1.18 32.327,30.317 C10.2
NetC11_2: C11.2 U1.3 X1.3 | length 8.8
  Top Layer w0.2: X1.3 24.904,40.58 C11.2 24.688,40.22 29.342,35.565 U1.3
NetC19_1: C19.1 UB1.1 Y1.1 | length 9.2
  Top Layer w0.254: Y1.1 53.137,38.278 53.772,38.913 53.772,42.316 ; UB1.1 53.772,42.316 ; C19.1 55.27,42.316 53.772,42.316
NetC20_2: C20.2 UB1.2 Y1.2 | length 11.4
  Top Layer w0.254: Y1.2 50.137,39.678 49.682,40.132 49.682,43.078 50.19,43.586 UB1.2 54.61,43.586 C20.2
NetC21_2: C21.2 RW1.2 RW3.2 | length 3.4
  Top Layer w0.5: C21.2 57.429,13.259 RW1.2@57.429,14.884
NetC57_1: C57.1 R42.2 U2.1 | length 9.8
  Top Layer w0.203: U2.1 33.5,13.485 34.798,14.783 v1(35.458,14.783) ; v1(38.227,14.783) 39.116,13.894 R42.2 C57.1
  Bottom Layer w0.203: v1(35.458,14.783) v1(38.227,14.783)
NetC62_1: C62.1 R45.2 U2.16 | length 5.9
  Top Layer w0.203: C62.1@24.943,6.071 24.994,6.121 R45.2 25.784,8.207 U2.16
NetL1_2: L1.2 U1.32 | length 3.5
  Top Layer w0.4: 30.537,36.531 L1.2
NetL2_2: L2.2 U1.15 | length 4.8
  Top Layer w0.2: L2.2@26.031,28.477 U1.15
NetLED1_1: LED1.1 R2.1 | length 1.7
  Bottom Layer w0.356: LED1.1 R2.1@52.987,45.718
NetLED1_2: LED1.2 LED2.2 LED3.2 LED4.2 LED5.2 LED6.2 LED7.2 LED8.2 LED9.2 LED10.2 LED11.2 LED12.2 Q4.3 | length 240.4
  Top Layer w0.4: v1(19.406,7.315) v1(21.336,7.315) ; v1(38.749,42.291) 38.76,42.28 v1(38.76,34.671) ; v1(50.292,4.293) v1(50.292,7.645) ; v1(50.317,37.033) 53.315,37.033 54.534,38.252 Q4.3
  Bottom Layer w0.4: 12.014,7.315 v1(19.406,7.315) ; 12.014,10.108 LED4.2 ; LED10.2 12.192,42.536 12.192,27.153 ; LED7.2 12.192,27.153 ; v1(21.336,7.315) 23.368,7.315 24.155,8.103 24.155,27.128 ; 24.155,10.185 LED5.2 ; LED8.2 24.155,27.128 ; LED11.2 24.155,41.989 24.155,27.128 ; LED6.2 37.719,10.134 ; v1(38.749,42.291) LED12.2 ; v1(38.76,34.671) 37.719,33.63 37.719,27.127 ; LED9.2 37.745,27.153 37.719,27.127 ; v1(50.292,4.293) 50.292,1.88 49.047,0.635 37.694,0.635 ; v1(50.292,7.645) 50.292,13.335 52.426,15.469 52.426,23.952 50.292,26.086 50.292,27.076 ; 50.292,10.107 LED3.2 ; LED1.2 50.292,43.217 50.292,27.076 ; LED2.2 50.315,27.099 50.292,27.076 ; 12.192,27.153 12.192,24.943 13.03,24.105 13.03,17.882 12.014,16.866 12.014,2.769 14.148,0.635 37.694,0.635 ; 37.694,0.635 37.719,0.66 37.719,10.134 ; 37.719,10.134 37.719,12.141 39.929,14.351 39.929,16.256 38.735,17.45 38.735,23.724 37.719,24.74 37.719,27.127
NetLED2_1: LED2.1 R3.1 | length 1.7
  Bottom Layer w0.4: LED2.1 R3.1@53.01,28.623
NetLED3_1: LED3.1 R4.1 | length 1.7
  Bottom Layer w0.4: LED3.1 R4.1@52.982,11.631
NetLED4_1: LED4.1 R5.1 | length 1.8
  Bottom Layer w0.4: LED4.1 R5.1
NetLED5_1: LED5.1 R6.1 | length 1.8
  Bottom Layer w0.4: LED5.1 R6.1
NetLED6_1: LED6.1 R7.1 | length 1.7
  Bottom Layer w0.4: LED6.1 R7.1
NetLED7_1: LED7.1 R8.1 | length 1.8
  Bottom Layer w0.4: LED7.1 R8.1
NetLED8_1: LED8.1 R9.1 | length 1.8
  Bottom Layer w0.4: LED8.1 R9.1
NetLED9_1: LED9.1 R10.1 | length 1.8
  Bottom Layer w0.4: LED9.1 R10.1
NetLED10_1: LED10.1 R11.1 | length 1.8
  Bottom Layer w0.4: LED10.1 R11.1@15.466,45.57
NetLED11_1: LED11.1 R12.1 | length 1.8
  Bottom Layer w0.356: LED11.1 27.988,45.621 R12.1
NetLED12_1: LED12.1 R13.1 | length 1.7
  Bottom Layer w0.4: LED12.1 R13.1@40.485,45.646
NetQ1_G: Q1.G Q2.G R23.2 R36.1 | length 10.4
  Top Layer w0.3: Q2.G 43.388,26.822 44.806,26.822 45.542,27.559 R23.2 R36.1 Q1.G@47.107,32.487
NetQ3_1: Q3.1 RW1.1 | length 1.6
  Top Layer w0.5: RW1.1 Q3.1@55.88,16.576
NetQ4_1: Q4.1 R20.1 R21.2 | length 3.5
  Top Layer w0.4: R20.1 R21.2 55.778,36.205 Q4.1
NetQ5_1: Q5.1 R22.1 | length 1.8
  Top Layer w0.3: Q5.1 44.313,5.171 R22.1
NetR1_1: R1.1 U2.27 | length 4.8
  Top Layer w0.203: U2.27 R1.1@39.103,9.207
NetR24_1: R24.1 T4.1 | length 3.1
  Top Layer w0.3: T4.1@14.351,13.929 R24.1
NetR26_1: R26.1 T6.1 | length 3.1
  Top Layer w0.3: R26.1 10.922,13.929 T6.1
NetR33_1: R33.1 U2.23 U2.24 | length 4.1
  Top Layer w0.203: U2.23 U2.24 R33.1@33.5,3.785
NetR34_2: R34.2 U2.19 | length 4.3
  Top Layer w0.203: R34.2 29.565,4.596 31,6.032 U2.19
NetR35_2: R35.2 U2.18 | length 4.6
  Top Layer w0.203: R35.2 28.295,4.114 30.5,6.319 U2.18
NetR36_2: R36.2 T2.3 | length 2.9
  Top Layer w0.508: T2.3 45.517,34.214 R36.2
NetR37_2: R37.2 R48.2 T2.1 | length 3.3
  Top Layer w0.508: R37.2 41.773,32.487 T2.1 42.316,31.943 R48.2
NetR38_1: R38.1 R39.1 T1.1 | length 3.4
  Top Layer w0.4: T1.1 R38.1 R39.1
NetR42_1: R42.1 R43.2 U2.2 | length 12.2
  Top Layer w0.203: U2.2 33,13.798 34.696,15.494 v1(35.458,15.494) ; v1(38.227,15.494) 38.76,15.494 40.03,14.224 R42.1 R43.2
  Bottom Layer w0.203: v1(35.458,15.494) v1(38.227,15.494)
NetR44_2: R44.2 U2.15 | length 4.3
  Top Layer w0.203: R44.2 29.22,8.712 U2.15
NetU1_2: U1.2 X1.1 | length 6.4
  Top Layer w0.152: X1.1 27.308,38.165 U1.2
P04/LED_RED: J2.3 R24.2 U1.27 | length 61.5
  Top Layer w0.2: R24.2 15.773,20.574 18.542,23.343 v1(32.664,23.343) ; U1.27 32.853,35.865 v1(35.966,35.865) 36.678,36.576 36.678,46.457 37.211,46.99 40.183,46.99 40.945,47.752 v1(42.723,47.752)
  Bottom Layer w0.2: v1(32.664,23.343) 34.925,23.343 35.966,24.384 v1(35.966,35.865) ; J2.3 42.723,50.559 v1(42.723,47.752)
P05/LED_GREEN: J2.2 R26.2 U1.28 | length 65.9
  Top Layer w0.2: R26.2 12.344,19.761 16.485,23.901 v1(31.928,23.901) ; U1.28 32.871,36.449 v1(35.408,36.449) 36.22,37.262 36.22,47.168 36.652,47.6 39.7,47.6 40.538,48.438 44.323,48.438 44.711,48.825 J2.2
  Bottom Layer w0.2: v1(31.928,23.901) 34.696,23.901 35.408,24.613 v1(35.408,36.449)
P06/MOTO1: J2.5 U1.29 | length 19.5
  Top Layer w0.178: U1.29 35.789,39.932 35.789,39.964 35.811,39.986 35.811,47.723 36.347,48.26 v1(38.71,48.26)
  Bottom Layer w0.178: v1(38.71,48.26) 38.71,50.57 J2.5
P07/MOTO0: J2.4 U1.30 | length 21.3
  Top Layer w0.178: U1.30 35.433,40.142 35.433,48.311 36.043,48.92 40.411,48.92 40.711,49.22 J2.4
PWR_CTL: R37.1 U1.11 | length 17.3
  Top Layer w0.2: v1(27.483,31.623) 27.483,32.192 U1.11 ; v1(33.884,33.909) R37.1
  Bottom Layer w0.2: v1(27.483,31.623) 28.423,30.683 32.258,30.683 33.884,32.309 v1(33.884,33.909)
RED_LL: J4.2 T4.3 | length 4.1
  Top Layer w0.508: J4.2 12.344,10.82 T4.3
REMOTO: U1.10
RSTN: J2.6 Q3.3 U1.8 | length 65.5
  Top Layer w0.2: v1(25.705,34.925) 27.154,34.925 U1.8 ; v1(49.428,36.373) v1(54.534,36.373) ; Q3.3 v1(56.617,20.498)
  Bottom Layer w0.2: v1(25.705,34.925) 25.705,36.347 27.889,38.532 36.711,38.532 ; J2.6 36.711,38.532 ; v1(49.428,36.373) 47.269,38.532 36.711,38.532 ; v1(54.534,36.373) 55.931,36.373 56.617,35.687 v1(56.617,20.498)
RX2/SETKEY: J3.3 U1.21 | length 20.9
  Top Layer w0.152: U1.21 39.348,24.994 43.51,24.994 45.504,23 J3.3
SCL: R14.2 R35.1 U1.25 UB1.6 | length 69.3
  Top Layer w0.178: v1(28.295,1.929) R35.1 ; U1.25 32.714,34.595 v1(37.16,34.595) 37.973,35.408 v1(37.973,40.792) ; R14.2 44.704,44.856 v1(45.034,44.856) UB1.6
  Bottom Layer w0.178: v1(28.295,1.929) 28.878,1.346 35.839,1.346 37.16,2.667 37.16,12.294 39.421,14.554 39.421,16.053 38.1,17.374 38.1,23.444 37.16,24.384 v1(37.16,34.595) ; v1(37.973,40.792) 43.612,40.792 45.034,42.215 v1(45.034,44.856)
SDA: R18.2 R34.1 U1.26 UB1.5 | length 68.4
  Top Layer w0.178: R34.1 v1(29.566,1.912) v1(29.566,1.912) ; U1.26 32.809,35.255 v1(36.551,35.255) 37.186,35.89 37.186,45.695 38.024,46.533 42.824,46.533 R18.2 44.094,46.126 UB1.5
  Bottom Layer w0.178: v1(29.566,1.912) 35.745,1.912 36.551,2.718 36.551,12.243 38.989,14.681 38.989,15.773 37.643,17.12 37.643,23.114 36.551,24.206 v1(36.551,35.255)
TSM3V3: C45.1 C57.2 C62.2 C66.2 R33.2 R40.2 R41.2 R46.1 U2.10 U2.28 | length 52.9
  Top Layer w0.2: v1(27.915,13.208) 27.915,11.557 28.265,11.207 U2.10 ; U2.28 35.666,9.707 v1(35.992,10.033) 36.703,10.744 C57.2
  Top Layer w0.3: 22.504,6.071 C62.2 ; 22.504,11.201 C66.2 ; v1(22.921,3.251) 22.504,3.668 22.504,12.243 23.47,13.208 v1(25.197,13.208) ; R41.2 R40.2 R33.2 34.544,2.784 ; v1(34.544,3.251) 34.544,2.784 ; 35.611,2.703 35.53,2.784 34.544,2.784
  Top Layer w0.406: R46.1 35.611,2.703 35.611,2.184 C45.1
  Bottom Layer w0.3: v1(22.921,3.251) v1(34.544,3.251) 35.509,3.251 35.992,3.734 v1(35.992,10.033) ; v1(25.197,13.208) v1(27.915,13.208)
TSM12_EN: Q5.3 R40.1 U2.21 | length 12.6
  Top Layer w0.203: U2.21 v1(32,5.185) 32,3.803 R40.1 ; v1(34.341,5.185) 39.526,5.185 Q5.3
  Bottom Layer w0.203: v1(32,5.185) v1(34.341,5.185)
TX2: J3.2 U1.20 | length 19.8
  Top Layer w0.152: U1.20 39.138,24.638 43.028,24.638 43.504,24.162 J3.2
UART_RD1: RD1.1 U1.23 | length 6.5
  Top Layer w0.2: U1.23 33.012,32.461 36.449,32.461 37.49,31.42 RD1.1
UART_TD1: TD1.1 U1.24 | length 5.6
  Top Layer w0.2: U1.24 33.044,32.995 37.846,32.995 TD1.1
V6V: J4.3 Q2.D R2.2 R3.2 R4.2 R5.2 R6.2 R7.2 R8.2 R9.2 R10.2 R11.2 R12.2 R13.2 R47.2 | length 222.8
  Top Layer w0.6: R47.2 v1(17.043,29.337) ; v1(17.043,8.255) J4.3 13.594,3.881 14.605,2.87 20.828,2.87 21.438,3.48 v1(21.438,6.096) ; v1(18.237,44.171) v1(29.21,44.171) ; v1(35.001,6.096) v1(38.887,6.096) ; v1(41.834,27.254) 42.443,27.864 Q2.D
  Bottom Layer w0.6: R11.2@15.494,44.171 17.043,44.171 ; R8.2 17.017,27.253 ; R5.2 17.018,10.211 ; v1@17.018,8.28 17.018,10.211 ; v1(18.237,44.171) 17.043,44.171 ; v1(21.438,6.096) 29.21,6.096 ; R12.2 v1(29.21,44.171) ; R9.2 28.042,26.467 26.086,24.511 26.086,17.247 29.185,14.148 29.185,10.439 ; R6.2 29.032,10.287 29.185,10.439 ; v1(35.001,6.096) 29.21,6.096 ; v1(38.887,6.096) 42.164,6.096 ; R7.2 42.164,10.236 ; R13.2 41.834,44.196 45.644,48.006 53.848,48.006 54.585,47.269 54.585,44.247 ; v1(41.834,27.254) R10.2 40.538,25.603 39.599,24.663 39.599,17.983 42.164,15.418 42.164,6.096 ; R4.2 54.508,10.211 ; R3.2 54.582,27.15 54.585,27.153 ; R2.2 54.559,44.221 54.585,44.247 ; 17.018,10.211 17.018,44.145 17.043,44.171 ; 29.185,10.439 29.185,6.121 29.21,6.096 ; 42.164,6.096 50.114,6.096 52.654,8.636 54,8.636 54.585,9.22 54.585,27.153 ; 54.585,27.153 54.585,29.845 53.518,30.912 53.518,38.659 54.585,39.726 54.585,44.247
VBAT: C23.1 C24.1 D1.2 J3.4 Q2.S R16.1 R23.1 U3.3 | length 69
  Top Layer w0.4: v1(20.743,37.16) R16.1 ; v1(20.752,22.682) 39.853,22.682 v1(40.615,21.92)
  Top Layer w0.8: Q2.S C23.1@47.676,25.832 ; C23.1 C23.1@47.676,25.832 ; D1.2 48.47,13.582 47.504,14.549 J3.4 47.504,25.66 C23.1@47.676,25.832 ; U3.3 C23.1@47.676,25.832
  Bottom Layer w0.4: v1(20.743,37.16) 20.743,22.691 v1(20.752,22.682) ; v1(40.615,21.92) 46.919,21.92 47.504,21.336 J3.4
VBUS: C21.1 D1.1 P2.2 RW2.1 | length 9.9
  Top Layer w0.5: P2.2 51.867,6.696 D1.1 55.328,9.582 55.677,9.931 C21.1
VDD: C1.2 C6.2 C8.2 C9.2 C15.2 L2.1 U1.1 U1.22 U1.31 | length 37.9
  Top Layer w0.2: v1(29.108,37.541) 29.115,37.535 29.115,36.924 U1.1 ; v1@29.115,37.541 C6.2 ; U1.31 31.934,37.209 v1(31.934,37.541) C1.2 ; U1.22 33.513,31.394 v1(33.96,31.394)
  Top Layer w0.4: C15.2 23.934,28.394 L2.1 v1(26.645,31.105) ; v1(33.96,31.394) C8.2@34.524,30.83 ; C8.2 34.697,30.727 C9.2
  Bottom Layer w0.4: v1(31.934,37.541) v1(29.108,37.541) 27.965,37.541 26.645,36.22 v1(26.645,31.105) 27.777,29.972 32.537,29.972 v1(33.96,31.394)
VDD3V3: Q1.D R20.2 R22.2 | length 36.9
  Top Layer w0.4: R22.2 46.736,9.017 v1(49.124,9.017) ; Q1.D@48.743,34.595 v1(49.479,34.595) R20.2
  Bottom Layer w0.4: v1(49.124,9.017) 49.124,13.183 51.486,15.545 51.486,23.749 49.479,25.756 v1(49.479,34.595)
pads on no net: J4.4 J4.5 U1.9 U1.13 U2.8 U2.14 U2.17 UB1. UB1.3 UB1.7 Y1.3

## Polygon pours and split planes (outlines as drawn)
GND on Top Layer "Top Layer-No Net" (solid, remove dead copper, pour order 4): 6.807,53.086 58.798,53.086 58.826,53.057 58.826,0 6.833,0
GND on Bottom Layer "Top Layer-No Net" (solid, remove dead copper, pour order 3): 6.807,53.086 58.798,53.086 58.826,53.057 58.826,0 6.833,0

## Keep-outs
Keep-Out Layer:
  pour cut-out: 26.06,21.717 26.645,22.301 37.617,22.301 37.998,21.92 37.998,10.363 37.44,9.804 34.196,9.804 33.75,10.25 33.75,11.75 33.5,12 30,12 29.75,11.75 29.75,10 29.5,9.75 29.446,9.804 26.848,9.804 26.06,10.592
  pour cut-out: 29.693,47.676 29.82,47.803 31.09,47.803 31.217,47.676 31.217,36.398 30.886,36.068 30.048,36.068 29.82,36.297 29.82,37.084
  pour cut-out: 33.02,53.057 33.02,45.822 32.588,45.39 19.05,45.39 18.39,46.05 18.39,53.035 18.412,53.057
  pour cut-out: 42.304,22.022 42.939,22.657 46.114,22.657 46.749,22.022 46.749,18.847 46.114,18.212 42.939,18.212 42.304,18.847
  pour cut-out: 51.143,37.338 52.286,37.338 52.667,37.719 52.667,40.386 52.286,40.767 51.143,40.767 50.762,40.386 50.762,37.719
  lines w0.127: 0,0 65,0 65,5.507 ccw(c64,5.507) 64,6.507 62.5,6.507 cw(c62.5,8.057) 62.5,9.607 64,9.607 ccw(c64,10.607) 65,10.607 65,40.507 ccw(c64,40.507) 64,41.507 62.5,41.507 cw(c62.5,43.057) 62.5,44.607 64,44.607 ccw(c64,45.607) 65,45.607 65,47.057 ccw(c59,47.057) 59,53.057 6,53.057 ccw(c6,47.057) 0,47.057 0,45.607 ccw(c1,45.607) 1,44.607 2.5,44.607 cw(c2.5,43.057) 2.5,41.507 1,41.507 ccw(c1,40.507) 0,40.507 0,10.607 ccw(c1,10.607) 1,9.607 2.5,9.607 cw(c2.5,8.057) 2.5,6.507 1,6.507 ccw(c1,5.507) 0,5.507 0,0

## Other copper
Top Layer:
  region net NetL1_2: 30.353,36.906 30.353,36.424 30.251,36.322 30.251,36.144 30.302,36.093 30.523,36.314 30.523,36.364 30.734,36.575 30.734,36.652

## Silkscreen, mask and mechanical layers (free items; w line width, h text height)
Top Overlay:
  lines w0.1: 6.816,0.73 6.816,52.307 58.886,52.307 58.886,0.73 6.816,0.73
  text "GND" at 34.392,49.327 h0.8 r270
  text "RS" at 36.297,49.327 h0.8 r270
  text "P06" at 38.329,49.327 h0.8 r270
  text "P07" at 40.361,49.327 h0.8 r270
  text "P04" at 42.393,49.327 h0.8 r270
  text "P05" at 44.298,49.327 h0.8 r270
  text "3V3" at 46.345,49.201 h0.8 r270
  text "JYD-TL200" at 8,41.75 h0.8
  text "2021-4-5 V1.0" at 7.25,40.25 h0.8
  text "+" at 13.945,19.279 h0.8 r90
  text "TX" at 43.028,17.272 h0.8 r270
  text "GND" at 40.945,17.12 h0.8 r270
  text "RX" at 45.009,17.12 h0.8 r270
  text "BAT" at 47.142,17.043 h0.8 r270
  text "G" at 11.455,9.779 h0.8 r90
  text "R" at 12.852,9.779 h0.8 r90
  text "V" at 14.122,9.779 h0.8 r90
  text "VBUS" at 50.114,1.194 h1.2
  text "GND" at 54.077,1.194 h1.2
Bottom Overlay:
  circle w0.127: c13.75,44.907 r4
  circle w0.127: c26.25,44.907 r4
  circle w0.127: c38.75,44.907 r4
  circle w0.127: c51.25,44.907 r4
  circle w0.127: c13.75,27.907 r4
  circle w0.127: c26.25,27.907 r4
  circle w0.127: c38.75,27.907 r4
  circle w0.127: c51.25,27.907 r4
  circle w0.127: c13.75,10.907 r4
  circle w0.127: c26.25,10.907 r4
  circle w0.127: c38.75,10.907 r4
  circle w0.127: c51.25,10.907 r4
  circle w0.127: c28.909,19.952 r0.5
  circle w0.127: c30.185,19.952 r0.5
  circle w0.127: c28.909,18.682 r0.5
  circle w0.127: c30.185,18.682 r0.5
  circle w0.127: c31.455,19.952 r0.5
  circle w0.127: c31.455,18.682 r0.5
  circle w0.127: c32.725,19.952 r0.5
  circle w0.127: c32.725,18.682 r0.5
  circle w0.127: c33.995,19.952 r0.5
  circle w0.127: c33.995,18.682 r0.5
  circle w0.127: c35.265,19.952 r0.5
  circle w0.127: c35.265,18.682 r0.5
  lines w0.1: 38.25,26.907 39.25,26.907 ; 38.25,43.907 39.25,43.907 ; 50.75,26.907 51.75,26.907
  lines w0.127: 38.25,26.907 38.25,28.907 39.25,28.907 39.25,26.907 ; 38.25,43.907 38.25,45.907 39.25,45.907 39.25,43.907 ; 50.75,26.907 50.75,28.907 51.75,28.907 51.75,26.907 ; 13.25,9.907 13.25,11.907 14.25,11.907 14.25,9.907 13.25,9.907 ; 13.25,26.907 13.25,28.907 14.25,28.907 14.25,26.907 13.25,26.907 ; 13.25,43.907 13.25,45.907 14.25,45.907 14.25,43.907 13.25,43.907 ; 25.75,9.907 25.75,11.907 26.75,11.907 26.75,9.907 25.75,9.907 ; 25.75,26.907 25.75,28.907 26.75,28.907 26.75,26.907 25.75,26.907 ; 25.75,43.907 25.75,45.907 26.75,45.907 26.75,43.907 25.75,43.907 ; 38.25,9.907 39.25,9.907 39.25,11.907 38.25,11.907 38.25,9.907 ; 50.75,9.907 50.75,11.907 51.75,11.907 51.75,9.907 50.75,9.907 ; 50.75,43.907 51.75,43.907 51.75,45.907 50.75,45.907 50.75,43.907
  text "7" at 28.423,21.311 h1 r270
  text "8" at 29.693,21.311 h1 r270
  text "9" at 30.963,21.311 h1 r270
  text "0" at 32.233,21.311 h1 r270
  text "*" at 33.503,21.311 h1 r270
  text "#" at 34.773,21.311 h1 r270
  text "6" at 28.473,16.662 h1 r270
  text "5" at 29.743,16.662 h1 r270
  text "4" at 31.013,16.662 h1 r270
  text "3" at 32.283,16.662 h1 r270
  text "2" at 33.553,16.662 h1 r270
  text "1" at 34.823,16.662 h1 r270
Top Solder:
  pour cut-out: 18.75,53.057 18.75,46.25 32.75,46.25 32.75,53.057